# Altium PCB RGB_PCB1PcbDoc.PcbDoc
Units mil, origin at the board's own origin, x right, y up, seen from the top; angles counter-clockwise.
Board outline 6000 x 4000 mil, 2 copper layers (Top Layer, Bottom Layer); 21 components, 34 nets, 103 pads, 0 vias.
Unrouted connection lines stored in the file: 55.
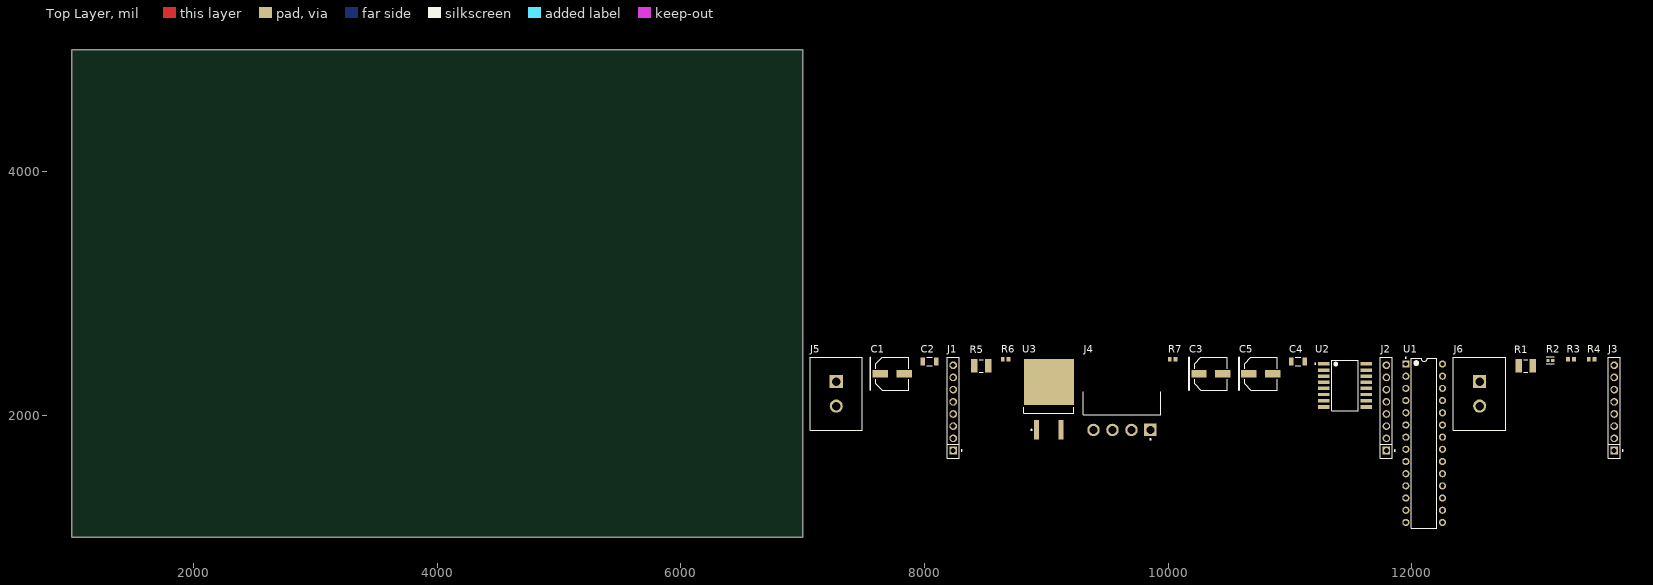
[diagram p0: Top Layer view]
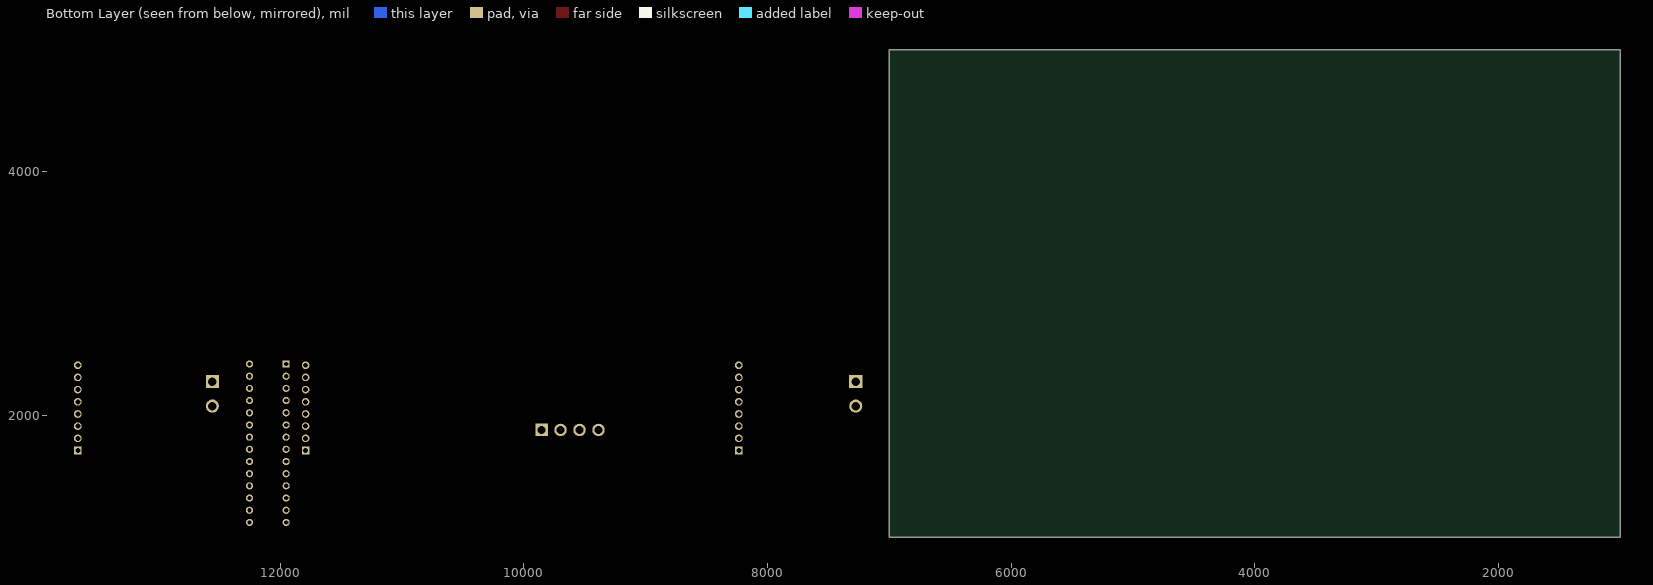
[diagram p1: Bottom Layer view, seen from below]

## Layer stack, top to bottom
Top Solder: solder mask 0.4, Solder Resist, Dk 3.5
Top Layer: signal copper 1.4
Dielectric 1: dielectric 12.6, FR-4, Dk 4.8
Bottom Layer: signal copper 1.4
Bottom Solder: solder mask 0.4, Solder Resist, Dk 3.5

## Board outline
1000,1000 7000,1000 7000,5000 1000,5000

## Design rules (kind name [scope] priority, off if disabled: settings)
Clearance [All] p1: gap=10 ignorepadtopadclearanceinfootprint=FALSE except(0: Arc-Hole Track-Hole SMDPad-Hole THPad-Hole Via-Hole Fill-Hole Poly-Hole Region-Hole Text-Hole)
PolygonConnect [All] p1: connectstyle=Relief reliefconductorwidth=10 reliefentries=4 polygonreliefangle="90 Angle" airgapwidth=10
RoutingVias [All] p1: holewidth=28 width=50 viastyle="Through Hole" minholewidth=28 minwidth=50 maxholewidth=28 maxwidth=50
SolderMaskExpansion [All] p1: expansion=4 istentingtop=FALSE
Width [All] p1: maxlimit=10 minlimit=10 preferedwidth=10
30 further rules are at their usual default settings.

## Components (designator, comment, footprint, x,y, rotation, side; value= is the part's Value field where it differs from the comment)
C1 "0.22µF" PNSC-FP-V-D_V 7735,2340 r0 top
C2 "0.10 μF" FP-C1206C-EB-MFG 8040,2440 r0 top
C3 "10µF" PNSC-FP-V-D_V 10350,2340 r0 top
C4 "0.10 μF" FP-C1206C-EB-MFG 11065,2440 r0 top
C5 "0.1µF" PNSC-FP-V-D_V 10760,2340 r0 top
J1 "SSW-108-01-G-S" FP-SSW-108-01-G-S-MFG 8235,2060 r90 top
J2 "SSW-108-01-G-S" FP-SSW-108-01-G-S-MFG 11790,2060 r90 top
J3 "SSW-108-01-G-S" FP-SSW-108-01-G-S-MFG 13660,2060 r90 top
J4 "647676-4" FP-647676-4-MFG 9620,2190 r0 top
J5 "350539-1" FP-350539-1-MFG 7275,2175 r90 top
J6 "350539-1" FP-350539-1-MFG 12555,2175 r90 top
R1 "150" RESC3126X60X50ML10T20 12935,2405 r0 top
R2 "10K" FP-MCS0402-IPC_A 13135,2450 r0 top
R3 "68R" RESC1608X55X30LL20T20 13305,2460 r0 top
R4 "68R" RESC1608X55X30LL20T20 13475,2460 r0 top
R5 "150" RESC3126X60X50ML10T20 8465,2405 r0 top
R6 "68R" RESC1608X55X30LL20T20 8665,2460 r0 top
R7 "68R" RESC1608X55X30LL20T20 10035,2460 r0 top
U1 "ATmega328-PU" 28P3 12100,1770 r0 top
U2 "PCF8574AT/3,518" FP-SOT162-1-MFG 11450,2245 r0 top
U3 "7805" TO-263_M 9020,2130 r90 top

## Footprints (in the part's own frame and the unit in brackets; to place one, negate y for a bottom-side part, rotate by r counter-clockwise, add the part's x,y. Pads: shape width x height; smd on the part's side, far side on the other; paste and mask are expansions set on the pad)
28P3 [mm] "28-Pin Plastic Dual In-Line Package (PDIP)"
  rect 1.5x1.5 hole 0.9: 1(-3.81,16.51)
  round 1.5 hole 0.9: 2(-3.81,13.97) 3(-3.81,11.43) 4(-3.81,8.89) 5(-3.81,6.35) 6(-3.81,3.81) 7(-3.81,1.27) 8(-3.81,-1.27) 9(-3.81,-3.81) 10(-3.81,-6.35) 11(-3.81,-8.89) 12(-3.81,-11.43) 13(-3.81,-13.97) 14(-3.81,-16.51) 15(3.81,-16.51) 16(3.81,-13.97) 17(3.81,-11.43) 18(3.81,-8.89) 19(3.81,-6.35) 20(3.81,-3.81) 21(3.81,-1.27) 22(3.81,1.27) 23(3.81,3.81) 24(3.81,6.35) 25(3.81,8.89) 26(3.81,11.43) 27(3.81,13.97) 28(3.81,16.51)
  silkscreen extent -3.93,-17.7 2.65,17.93, body extent -3.6,-17.65 3.6,17.65, height 4.58
FP-350539-1-MFG [mil]
  rect 107.4x107.4 hole 70 paste-39370.1 mask+0: 1(100,0)
  round 107.4 hole 70 paste-39370.1 mask+0: 2(-100,0)
  silkscreen extent -300,-215 300,215, body extent -304,-219 304,219, height 10
FP-647676-4-MFG [mm]
  rect 2.6x2.6 hole 1.7 paste-1000 mask+0: 1(5.94,-7.9)
  round 2.6 hole 1.7 paste-1000 mask+0: 2(1.98,-7.9) 3(-1.98,-7.9) 4(-5.94,-7.9)
  silkscreen extent -8.08,-9.97 8.08,0.08, body extent -8.08,-9.3 8.08,7.32, height 0.25
FP-C1206C-EB-MFG [mm]
  rect 0.95x1.7 smd paste+0 mask+0: 1(-1.4,0) 2(1.4,0)
  silkscreen extent -0.55,-0.9 0.55,0.9, body extent -2,-1 2,1, height 0.25
FP-MCS0402-IPC_A [mil]
  rect 26.19x26.48 smd paste+0 mask+0: 1(-19.83,0) 2(19.83,0)
  silkscreen extent -33,-29 33,29, body extent -41,-21 41,21, height 10
FP-SOT162-1-MFG [mm]
  rect 2.4x0.8 smd paste+0 mask+0: 1(-4.4,4.495) 8(-4.4,-4.495) 9(4.4,-4.495) 16(4.4,4.495)
  rect 2.4x0.7 smd paste+0 mask+0: 2(-4.4,3.175) 3(-4.4,1.905) 4(-4.4,0.635) 5(-4.4,-0.635) 6(-4.4,-1.905) 7(-4.4,-3.175) 10(4.4,-3.175) 11(4.4,-1.905) 12(4.4,-0.635) 13(4.4,0.635) 14(4.4,1.905) 15(4.4,3.175)
  silkscreen extent -6.3,-5.25 2.75,5.25, body extent -5.72,-5.95 5.72,5.95, height 0.25
FP-SSW-108-01-G-S-MFG [mm]
  rect 1.59x1.59 hole 1.04 paste-1000 mask+0: 1(-8.89,0)
  round 1.59 hole 1.04 paste-1000 mask+0: 2(-6.35,0) 3(-3.81,0) 4(-1.27,0) 5(1.27,0) 6(3.81,0) 7(6.35,0) 8(8.89,0)
  silkscreen extent -10.54,-1.88 10.54,1.27, body extent -10.64,-1.37 10.64,1.37, height 0.25
PNSC-FP-V-D_V [mm] "CAPAE, 2-Leads, Body 6.80x6.80mm"
  rect 3.2x1.6 smd: 1(-2.5,0) 2(2.5,0)
  silkscreen extent -4.6,-3.4 3.4,3.4, body extent -3.9,-3.4 3.9,3.4, height 6.1
RESC1608X55X30LL20T20 [mm] "Chip Resistor, 2-Leads, Body 1.60x0.80mm, IPC High Density"
  rect 0.8x0.9 smd: 1(-0.6,0) 2(0.6,0)
  body extent -0.9,-0.5 0.9,0.5, height 0.55
RESC3126X60X50ML10T20 [mm] "Chip Resistor, 2-Leads, Body 3.10x2.60mm, IPC Low Density"
  rect 1.35x2.8 smd: 1(-1.475,0) 2(1.475,0)
  silkscreen extent -0.4,-1.3 0.4,1.3, body extent -1.6,-1.35 1.6,1.35, height 0.6
TO-263_M [mm] "D2-PAK, 4-Leads, Body 9.2x10.2mm, Pitch 2.54mm, Lead Span 15.4mm, IPC Low Density"
  rect 4.1x1.05 smd: 1(-6.35,2.54) 3(-6.35,-2.54)
  rect 9.6x10.45 smd: 4(3.6,0)
  silkscreen extent -6.47,-5.2 -1.6,5.2, body extent -2.9,-5.2 6.45,5.2, height 4.6

## Part data
C1 C3 C5: library part CMP-2000-06216-1, "Aluminum Electrolytic Capacitor, 47 uF, +/- 20%, 35 V, 2-Pin SMD (Size Code D), -55 to 105 degC, RoHS, Tape and Reel", Case Size/Dimension=Ø6.3x5.8mm, ESR (Equivalent Series Resistance)=0.26O, Lifetime@Temperature=2000Hrs@105°C, Manufacturer=Panasonic, Operating Temp Range=-55to+105°C, Operating Temp-Max=105°C, Package Description="2-Pin Electrolytic Aluminum Capacitor, Body 6.6 x 6.6 mm", Package Reference=FP-V-D, Rated Voltage=35V, Ripple Current=300mA, Datasheet URL=http://industrial.panasonic.com/cdbs/www-data/pdf/RDE0000/ABA0000C1184.pdf, Datasheet Version=03/2016, Manufacturer URL=http://www.panasonic.com/, Mounting Technology=SurfaceMount, Package URL=http://industrial.panasonic.com/cdbs/www-data/pdf/RDE0000/DME0000COL48.pdf, Series=FP, Type=Can
  C1: Capacitance=0.22µF
  C3: Capacitance=10µF
  C5: Capacitance=0.1µF
C2 C4: library part CMP-03020-000153-1, "CAP CER 0.1UF 100V X7R 1206,C1206C104K1RACTU", Manufacturer=KEMET, Manufacturer Part Number=C1206C104K1RACTU, Package=C1206C-EB, Temperature="-55°C to +150°C", Temperature Characteristic=X7R, Temperature Coefficient=15%, Temperature Range High=+150°C, Temperature Range Low=-55°C, Tolerance=0.1, Voltage Rating="100 V", Automotive=Yes, Automotive Grade="Grade 0", Capacitance="0.10 μF", Category=Cap, ComponentLink2Description=Datasheet, ComponentLink2URL=https://content.kemet.com/datasheets/KEM_C1007_X8R_ULTRA_150C_SMD.pdf, Device Class L1="Passive Components", Device Class L2=Capacitors, Device Class L3="Ceramic Capacitors", Digikey Description="CAP CER 0.1UF 100V X7R 1206", Height=0.88mm, Ipc Land Pattern Name=CAPC320160X78, Lead Free=Yes, Material=Ceramic, Mouser Description="CAP CER 0.1UF 100V X7R 1206", Octopart=https://octopart.com/c1206c104k1ractu-kemet-89521, RoHS=TRUE
J1 J2 J3: library part CMP-1272-00001-2, "CONN RCPT 8POS 0.1 GOLD PCB", Color=Black, Contact Resistance=10mR, Current Rating=6.9A, Max Operating Temperature=125°C, Max Voltage Rating (AC)=550V, Min Operating Temperature=-55°C, Connector Type=Socket, Contact Material=Bronze, Contact Plating=Gold, Contact Type="Female Socket", Depth=2.41mm, Gender=Receptacle, Housing Color=Black, Housing Material=Polymer, Lead Free="Lead Free", Length=20.83mm, Mating Cycles=100, Max Current Rating=6.9A, Number of Contacts=8, Number of Positions=8, Number of Rows=1, Orientation=Vertical, Packaging=Bulk, Pitch=2.54mm, Radiation Hardening=No, REACH SVHC="No SVHC", RoHS Compliant=Yes, Series=SSW, Termination=Solder, Voltage Rating=550V
J4: library part CMP-03369-000065-1, "CONN HEADER R/A 4POS 3.96MM", Current Rating=7.5A, Manufacturer=TE, Temperature="-25°C to +105°C", Temperature Range High=+105°C, Temperature Range Low=-25°C, Voltage Rating=250V, Automotive=No, Category=Conn, ComponentLink2Description=Datasheet, ComponentLink2URL=https://www.te.com/commerce/DocumentDelivery/DDEController?Action=showdoc&DocId=Specification+Or+Standard%7F108-2297%7FB%7Fpdf%7FEnglish%7FENG_SS_108-2297_B_108-2297RevB.pdf%7F647676-6, Conn Gender=Male, Conn Orientation="Right Angle", Contact Material=Tin, Device Class L1=Connectors, Device Class L2="Headers and Wire Housings", Device Class L3=unset, Digikey Description="CONN HEADER R/A 4POS 3.96MM", Footprint Url=https://www.te.com/commerce/DocumentDelivery/DDEController?Action=showdoc&DocId=Customer+Drawing%7F647676%7FB1%7Fpdf%7FEnglish%7FENG_CD_647676_B1.pdf%7F647676-6, Height=8.8mm, Lead Free=Yes, Manufacturer Part Number=647676-4, Mouser Description="4 Position Single Row 3.96 mm Right Angle Header Unshrouded Male Pin Connector", Number of Contacts=4, Number of Rows=1, Octopart=https://octopart.com/647676-4-te+connectivity-41901901, Package=647676-4, Pitch=3.96mm, RoHS=TRUE
J5 J6: library part CMP-03369-000078-1, "CONN HEADER VERT 2POS 5.08MM", Current Rating=12A, Manufacturer="TE Connectivity", Temperature="-55°C to +105°C", Temperature Range High=+105°C, Temperature Range Low=-55°C, Voltage Rating=250V, Automotive=No, Category=Conn, ComponentLink2Description=Datasheet, ComponentLink2URL=https://www.te.com/usa-en/product-350539-1.html?te_bu=Cor&te_type=other&te_campaign=oct_glo_cor-oct-global-oth-prtnr-fy19-oct-octo-buy-bom_sma-298_2&elqCampaignId=35216, Conn Gender=Male, Conn Orientation=Vertical, Contact Material=Gold,Nickel, Device Class L1=Connectors, Device Class L2="Headers and Wire Housings", Device Class L3=unset, Digikey Description="CONN HEADER VERT 2POS 5.08MM", Height=0.41inch, Lead Free=Yes, Manufacturer Part Number=350539-1, Mouser Description="Pin & Socket Connectors CONN PCM 2 POS TIN", Number of Contacts=2, Number of Rows=1, Octopart=https://octopart.com/350539-1-te+connectivity-46510628, Package=350539-1, Pitch=5.08mm, RoHS=TRUE, Standoff Height=0.025inch
R1 R5: library part CMP-2005-01727-1, "RC1210JR-07150RL", Manufacturer=Yageo, Part Number=RC1210JR-07150RL
R2: library part CMP-02407-001558-1, "RES SMD 10K OHM 0.1% 1/10W 0402, MCS0402MD1002BE100", Case Code (Imperial)=0402, Case Code (Metric)=1005, Max Operating Temperature=155°C, Min Operating Temperature=-55°C, Power Rating=63mW, Resistance=10kR, Temperature Coefficient=25ppm/°C, Tolerance=0.1%, Voltage Rating=50V, Case/Package=0402, Composition="Thin Film", Contact Plating=Tin, Height=0.32mm, Lead Free="Lead Free", Length=1mm, Packaging="Tape and Reel", Weight=2.1E-05oz, Width=0.5mm
R3 R4 R6 R7: library part CMP-2000-00110-1, "ERA3AEB680V", Manufacturer=Panasonic, Part Number=ERA3AEB680V
U1: library part CMP-0095-00015-2, "8-bit AVR Microcontroller, 32KB Flash, 1KB EEPROM, 2KB SRAM, 28-pin PDIP, Industrial Grade (-40°C to 85°C)", ComponentLink1Description="Manufacturer URL", ComponentLink1URL=http://www.atmel.com/, ComponentLink2Description="ATmega48A/48PA/88A/88PA/168A/168PA/328/328P Datasheet", ComponentLink2URL=http://www.atmel.com/dyn/resources/prod_documents/8271.pdf, ComponentLink3Description="ATmega48A/48PA/88A/88PA/168A/168PA/328/328P Summary", ComponentLink3URL=http://www.atmel.com/dyn/resources/prod_documents/8271S.pdf, DatasheetVersion="revD, May-2011", PackageDescription="28-lead (0.300\"/7.62mm Wide) Plastic Dual Inline Package (PDIP)", PackageReference=28P3, PackageVersion="revB, Sep-2001", RevisionNote="DatasheetVersion updated. URLs added."
U2: library part CMP-10112-000003-1, "IC I/O EXPANDER I2C 8B 16SOIC", Ambient Temperature Range High=+85°C, Ambient Temperature Range Low=-40°C, Frequency=100kHz, Manufacturer="NXP Semiconductors", Max Junction Temp=+125°C, Max Supply Voltage=6V, Min Supply Voltage=2.5V, Nominal Supply Current=40uA, Package=SOT162-1, Temperature="-40°C to +85°C", Automotive=No, Category=IC, ComponentLink2Description=Datasheet, ComponentLink2URL=https://www.nxp.com/docs/en/data-sheet/PCF8574_PCF8574A.pdf, Device Class L1="Integrated Circuits (ICs)", Device Class L2="Interface ICs", Device Class L3="I/O Expanders", Digikey Description="IC I/O EXPANDER I2C 8B 16SOIC", Footprint Url=https://www.nxp.com/docs/en/package-information/SOT162-1.pdf, Height=2.65mm, Interface=I2C,SMBus, Ipc Land Pattern Name=SOIC127P1032X265-16, Lead Free=Yes, Manufacturer Part Number=PCF8574AT/3,518, Mouser Description="PCF8574 Series 2.5 to 6V Remote 8-bit I/O Expander for I2C-bus -SOIC-16", Number Of I/Os=8, Octopart=https://octopart.com/pcf8574at%2F3%2C518-nxp+semiconductors-11541925, RoHS=TRUE, Standoff Height=0.1mm, Temperature Range High=+85°C, Temperature Range Low=-40°C
U3: library part CMP-0244-00213-1, "Positive Voltage Regulator, 3-Pin D2PAK, Tape and Reel, L7805CD2T-TR", ComponentLink1Description="Manufacturer URL", ComponentLink1URL=http://www.st.com, ComponentLink2Description=Datasheet, ComponentLink2URL=http://www.st.com/internet/com/TECHNICAL_RESOURCES/TECHNICAL_LITERATURE/DATASHEET/CD00000444.pdf, DatasheetVersion=16/11/2011, PackageDescription="3-Pin Transistor Outline Package 2.54 mm Pitch, 15.4 mm Lead Span (D2PAK)", PackageReference=TO-263, PackageVersion=2011

## Nets (pads, with @x,y where several pads share a name; then routed paths per layer and width w, separated by ;. In a path a pad name is that pad's centre, name@x,y a point inside that pad or via, vN(x,y) a via of type N, cw(c..) or ccw(c..) an arc to the next point about the centre after c; other vN are vias at no path point)
5V: J3.7 U1.7 U1.20
" 5V": C3.1 C4.2 J6.1 U3.3
GND: C1.2 C2.1 C3.2 C4.1 C5.2 J2.7 J3.1 J4.4 J5.2 J6.2 R2.1 U1.8 U1.22 U2.1 U2.2 U2.3 U3.4
NetC5_1: C5.1 U1.21
NetJ1_1: J1.1 U1.10
NetJ1_2: J1.2 U1.9
NetJ1_3: J1.3 U1.19
NetJ1_4: J1.4 U1.18
NetJ1_5: J1.5 U1.17
NetJ1_6: J1.6 U1.16
NetJ1_7: J1.7 U1.15
NetJ1_8: J1.8 U1.14
NetJ2_1: J2.1 U2.4
NetJ2_2: J2.2 U2.5
NetJ2_3: J2.3 U2.9
NetJ2_4: J2.4 U2.10
NetJ2_5: J2.5 U2.11
NetJ2_6: J2.6 U2.12
NetJ3_4: J3.4 R1.1
NetJ3_5: J3.5 R3.1
NetJ3_6: J3.6 R4.1
NetJ3_8: J3.8 R2.2 U1.26
NetJ4_1: J4.1 R7.2
NetJ4_2: J4.2 R6.2
NetJ4_3: J4.3 R5.2
NetR1_2: R1.2 U1.23
NetR3_2: R3.2 U1.24
NetR4_2: R4.2 U1.25
NetR5_1: R5.1 U1.12
NetR6_1: R6.1 U1.11
NetR7_1: R7.1 U1.5
NetU1_27: U1.27 U2.15
NetU1_28: U1.28 U2.14
VCC: C1.1 C2.2 J5.1 U3.1
pads on no net: J2.8 J3.2 J3.3 U1.1 U1.2 U1.3 U1.4 U1.6 U1.13 U2.6 U2.7 U2.8 U2.13 U2.16